# EAGLE board Joystick (EAGLE 6.5.0)
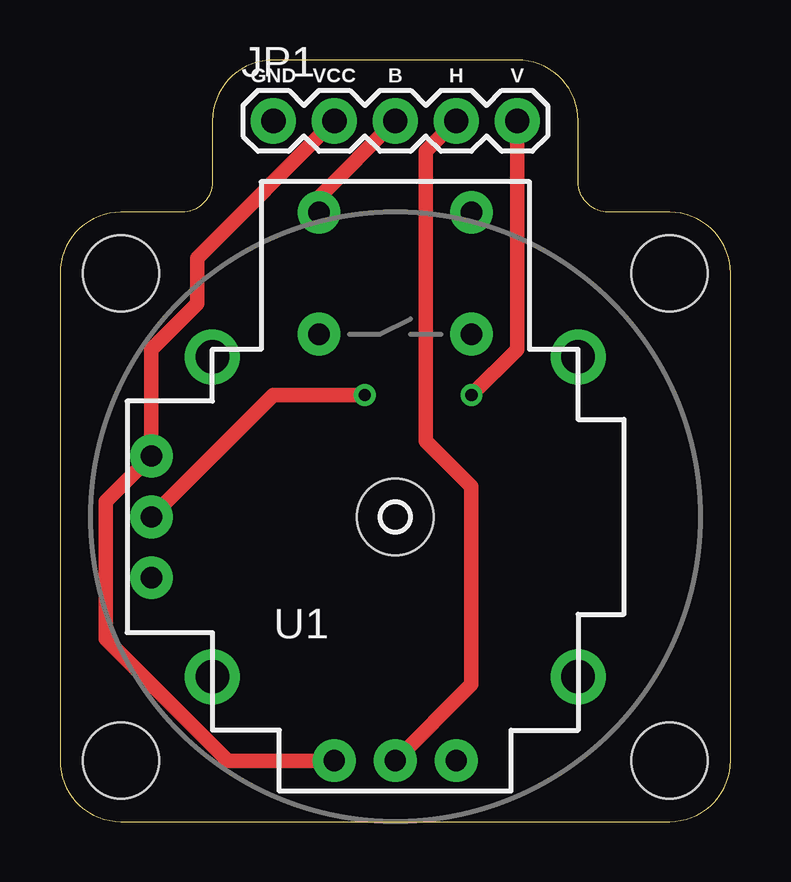
[diagram p0: board, top side]
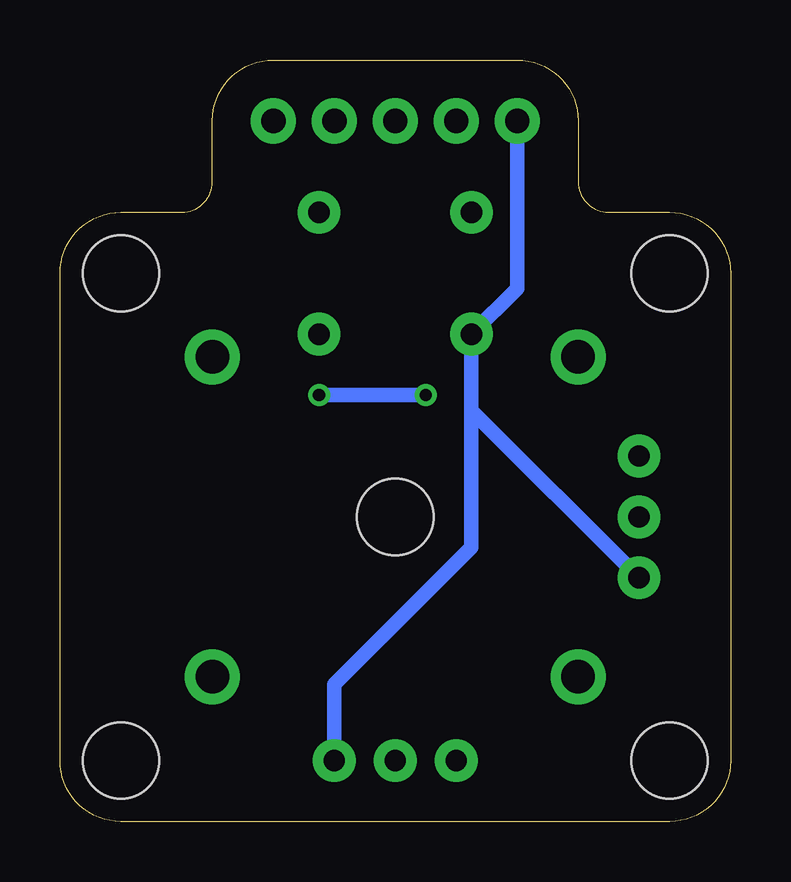
[diagram p1: board, bottom side, seen from below]

Size 27.94 x 31.75 mm. Coordinates in mm from the lower left corner, seen from the top.
Outline: 0,22.86 0,2.54 arc90 2.54,0 25.4,0 arc90 27.94,2.54 27.94,22.86 arc90 25.4,25.4 22.86,25.4 arc-90 21.59,26.67 21.59,29.21 arc90 19.05,31.75 8.89,31.75 arc90 6.35,29.21 6.35,26.67 arc-90 5.08,25.4 2.54,25.4 arc90 0,22.86
Copper layers (1*16): Top 0.035mm / dielectric 1.5mm / Bottom 0.035mm
Design rules "default": minimum track width 10mil, minimum drill 24mil, track to track 8mil, track to pad 8mil, pad to pad 8mil, via to via 8mil, smd to smd 8mil, copper to edge 40mil, drill to drill 8mil, minimum pad ring 10mil, minimum via ring 8mil, stop-mask expansion 4mil, vias tented up to drill 0mil, thermal gap 10mil
Holes 3.17 mm at 2.54,2.54 25.4,2.54 2.54,22.86 25.4,22.86 13.97,12.7

## Footprints (pad centres in the part's own frame; a part is rotated, then mirrored left to right if it is on the bottom)
1X05 = drill 1.016 pad 1.88: 1 0,0; 2 2.54,0; 3 5.08,0; 4 7.62,0; 5 10.16,0
JOYSTICK = drill 0.9 pad 1.778: B1A -3.175,12.7; B1B 3.175,12.7; B2A -3.175,7.62; B2B 3.175,7.62 | drill 0.889 pad 1.778: H1 -2.54,-10.16; H2 0,-10.16; H3 2.54,-10.16; V1 -10.16,2.54; V2 -10.16,0; V3 -10.16,-2.54 | drill 1.397 pad 2.286: MOUNT1 -7.62,6.668; MOUNT2 -7.62,-6.668; MOUNT3 7.62,-6.668; MOUNT4 7.62,6.668

## Placement (x,y rotation side)
JP1  [1X05]  8.89,29.21 0 top
U1  JOYSTICKPTH  [JOYSTICK]  13.97,12.7 0 top

## Library data of the parts
JP1 = SparkFun-Connectors
U1 = SparkFun-Electromechanical

## Nets
B: JP1.3 U1.B1A
GND: JP1.1 U1.B2A U1.H3 U1.V3
H: JP1.4 U1.H2
V: JP1.5 U1.V2
VCC: JP1.2 U1.H1 U1.V1

## Tracks (layer width: path | path; a pad name or v marks a point on that pad's centre or on a via)
B
  Top 0.61: U1.B1A 10.79,26.04 JP1.3
GND
  Bottom 0.61: JP1.1 8.89,22.23 U1.B2A 10.79,17.14 | 10.79,17.14 U1.V3 | U1.H3 16.51,5.71 10.79,11.43 10.79,17.14
H
  Top 0.61: JP1.4 15.24,27.94 15.24,15.88 17.14,13.97 17.14,5.71 U1.H2
V  (via drill 0.51)
  Top 0.61: JP1.5 19.05,19.68 v17.14,17.78 | v12.7,17.78 8.89,17.78 U1.V2
  Bottom 0.61: v17.14,17.78 v12.7,17.78
VCC
  Top 0.61: JP1.2 5.71,23.5 5.71,21.59 3.81,19.68 U1.V1 1.91,13.34 1.91,7.62 6.99,2.54 U1.H1

## Text on the board
tPlace: GND | VCC | B | H | V